# EAGLE board DWSTM32BAT (EAGLE 7.7.0)
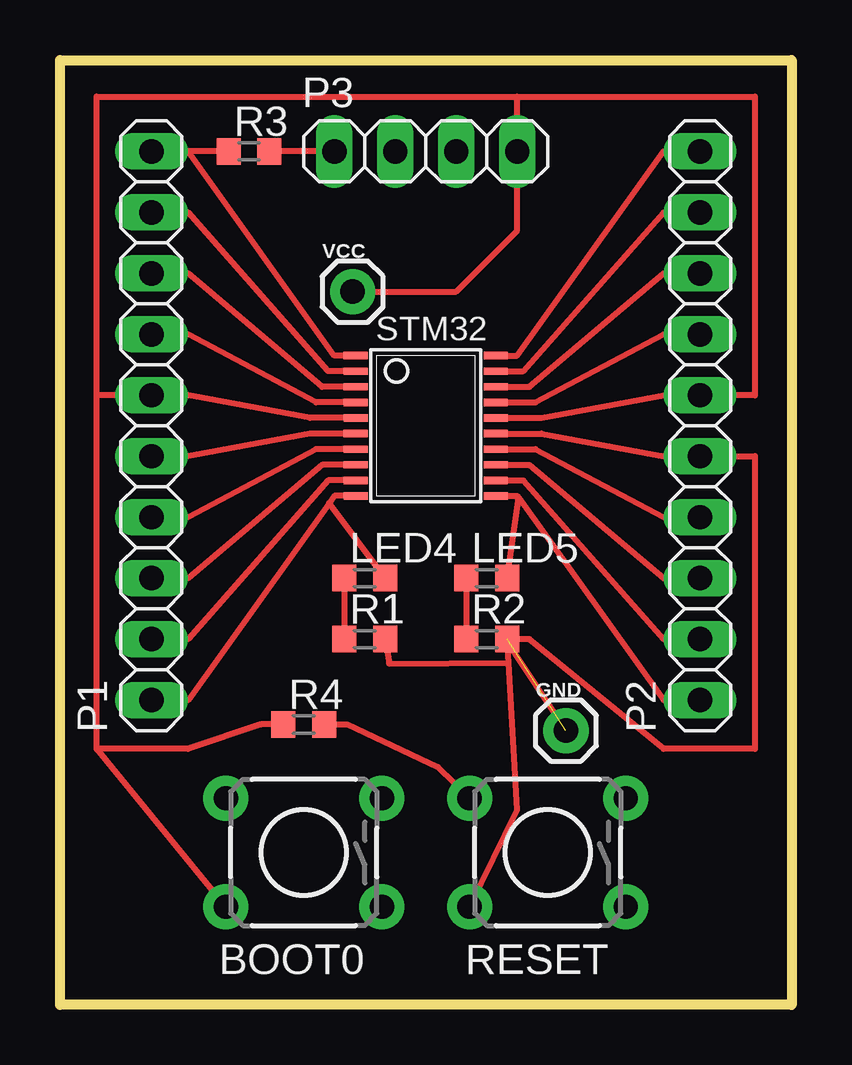
[diagram p0: board, top side]
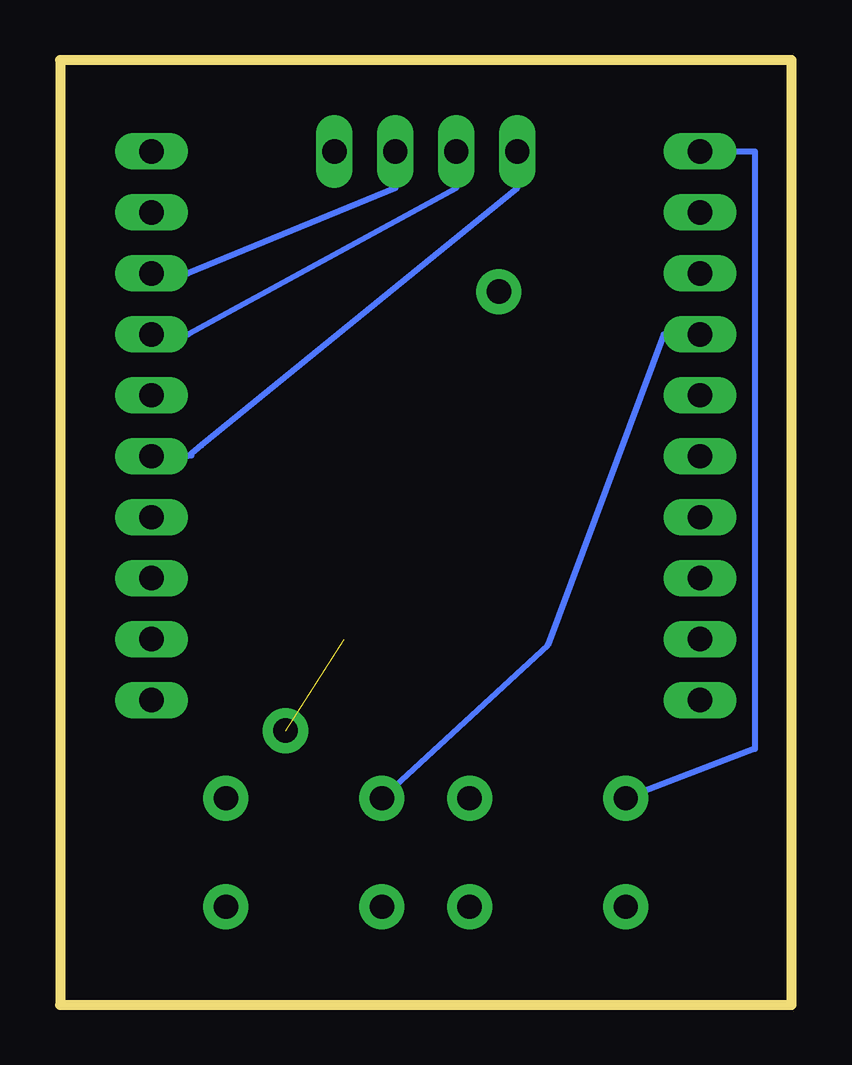
[diagram p1: board, bottom side, seen from below]

Size 30.48 x 39.37 mm. Coordinates in mm from the lower left corner, seen from the top.
Outline: 0,39.37 30.48,39.37 30.48,0 0,0 0,39.37
Copper layers (1*16): Top 0.035mm / dielectric 1.5mm / Bottom 0.035mm
Design rules "default": minimum track width 10mil, minimum drill 24mil, track to track 8mil, track to pad 8mil, pad to pad 8mil, via to via 8mil, smd to smd 8mil, copper to edge 40mil, drill to drill 8mil, minimum pad ring 10mil, minimum via ring 8mil, stop-mask expansion 4mil, vias tented up to drill 0mil, thermal gap 10mil

## Footprints (pad centres in the part's own frame; a part is rotated, then mirrored left to right if it is on the bottom)
TACTILE-PTH = drill 1.016 pad 1.88: 1 -3.251,2.261; 2 3.251,2.261; 3 -3.251,-2.261; 4 3.251,-2.261
1X01 = drill 1.016 pad 1.88: 1 0,0
R0603 = smd 1 x 1.1: 1 -0.85,0; 2 0.85,0
1X10 = drill 1.016 long: 1 -11.43,0; 2 -8.89,0; 3 -6.35,0; 4 -3.81,0; 5 -1.27,0; 6 1.27,0; 7 3.81,0; 8 6.35,0; 9 8.89,0; 10 11.43,0
1X04 = drill 1.016 long: 1 -3.81,0; 2 -1.27,0; 3 1.27,0; 4 3.81,0
TSSOP20 = smd 0.305 x 0.991: 1 -2.925,-2.918; 2 -2.275,-2.918; 3 -1.625,-2.918; 4 -0.975,-2.918; 5 -0.325,-2.918; 6 0.325,-2.918; 7 0.975,-2.918; 8 1.625,-2.918; 9 2.275,-2.918; 10 2.925,-2.918; 11 2.925,2.918; 12 2.275,2.918; 13 1.625,2.918; 14 0.975,2.918; 15 0.325,2.918; 16 -0.325,2.918; 17 -0.975,2.918; 18 -1.625,2.918; 19 -2.275,2.918; 20 -2.925,2.918

## Placement (x,y rotation side)
BOOT0  [TACTILE-PTH]  10.16,6.35 180 top
GND  [1X01]  21.08,11.43 0 top
LED4  [R0603]  12.7,17.78 0 top
LED5  [R0603]  17.78,17.78 0 top
P1  [1X10]  3.81,24.13 90 top
P2  [1X10]  26.67,24.13 90 top
P3  [1X04]  15.24,35.56 0 top
R1  [R0603]  12.7,15.24 0 top
R2  [R0603]  17.78,15.24 0 top
R3  [R0603]  7.87,35.56 0 top
R4  [R0603]  10.16,11.68 0 top
RESET  [TACTILE-PTH]  20.32,6.35 180 top
STM32  [TSSOP20]  15.24,24.13 270 top
VCC  [1X01]  12.19,29.72 0 top

## Library data of the parts
BOOT0 RESET = SparkFun-Electromechanical
GND VCC = SparkFun-Connectors
LED4 LED5 R1-R4 = ref-packages
P1-P3 = pinhead
STM32 = ref-packages-longpad

## Nets
BOOT0: BOOT0.4 P1.10 R3.1 STM32.1
GND: GND.1 P2.5 P3.1 R1.2 R2.2 R3.2 RESET.2 STM32.15
NRST: P1.7 R4.2 RESET.4 STM32.4
PA0: P1.5 STM32.6
PA1: P1.4 STM32.7
PA2: P1.3 STM32.8
PA3: P1.2 STM32.9
PA4: LED4.2 P1.1 STM32.10
PA5: LED5.2 P2.1 STM32.11
PA6: P2.2 STM32.12
PA7: P2.3 STM32.13
PB1: P2.4 STM32.14
PF0: P1.9 STM32.2
PF1: P1.8 STM32.3
RLED4: LED4.1 R1.1
RLED5: LED5.1 R2.1
RX: P2.8 P3.3 STM32.18
SWCLK: P2.10 STM32.20
SWDIO: P2.9 STM32.19
TX: P2.7 P3.2 STM32.17
VCC: BOOT0.2 P1.6 P2.6 P3.4 R4.1 STM32.5 STM32.16 VCC.1

## Tracks (layer width: path | path; a pad name or v marks a point on that pad's centre or on a via)
BOOT0
  Top 0.254: STM32.1 11.43,27.05 5.33,35.56 | 5.33,35.56 P1.10 | R3.1 5.33,35.56
  Bottom 0.254: P1.10 1.52,35.56 1.52,10.67 BOOT0.4
GND  (1 unrouted)
  Top 0.254: STM32.15 20.07,23.8 25.15,22.86 P2.5 28.96,22.86 28.96,10.67 25.15,10.67 19.56,15.24 R2.2 18.69,14.25 | P3.1 R3.2 | RESET.2 19.05,8.13 18.69,14.25 | R1.2 13.72,14.22 18.69,14.25 | 18.54,15.24 GND.1
  Bottom 0.254: P3.1 11.43,34.04 24.59,23.31 25.15,22.86 P2.5 24.99,22.89
NRST
  Top 0.254: STM32.4 10.67,25.11 5.33,27.94 P1.7 | R4.2 11.94,11.68 15.75,9.91 RESET.4
  Bottom 0.254: P1.7 5.33,27.94 10.16,14.99 RESET.4
PA0
  Top 0.254: STM32.6 10.41,23.8 5.33,22.86 P1.5
PA1
  Top 0.254: STM32.7 10.67,23.16 5.33,20.32 P1.4
PA2
  Top 0.254: STM32.8 10.92,22.51 5.33,17.78 P1.3
PA3
  Top 0.254: STM32.9 11.18,21.86 5.33,15.24 P1.2
PA4
  Top 0.254: STM32.10 11.43,21.21 11.22,20.91 | 11.22,20.91 5.33,12.7 P1.1 | LED4.2 11.22,20.91
PA5
  Top 0.254: STM32.11 19.05,21.21 19.11,21.12 | 19.11,21.12 25.15,12.7 P2.1 | LED5.2 19.11,21.12
PA6
  Top 0.254: STM32.12 19.3,21.86 25.15,15.24 P2.2
PA7
  Top 0.254: STM32.13 19.56,22.51 25.15,17.78 P2.3
PB1
  Top 0.254: STM32.14 19.81,23.16 25.15,20.32 P2.4
PF0
  Top 0.254: STM32.2 11.18,26.41 5.33,33.02 P1.9
PF1
  Top 0.254: STM32.3 10.92,25.76 5.33,30.48 P1.8
RLED4
  Top 0.254: LED4.1 R1.1
RLED5
  Top 0.254: LED5.1 R2.1
RX
  Top 0.254: STM32.18 19.56,25.76 25.15,30.48 P2.8
  Bottom 0.254: P3.3 16.51,34.04 25.15,30.48 P2.8
SWCLK
  Top 0.254: STM32.20 19.05,27.05 25.15,35.56 P2.10
SWDIO
  Top 0.254: STM32.19 19.3,26.41 25.15,33.02 P2.9
TX
  Top 0.254: STM32.17 19.81,25.11 25.15,27.94 P2.7
  Bottom 0.254: P3.2 13.97,34.04 25.15,27.94 P2.7
VCC
  Top 0.254: STM32.16 20.07,24.46 25.15,25.4 P2.6 28.96,25.4 28.96,37.85 19.05,37.85 | STM32.5 10.41,24.46 5.33,25.4 P1.6 1.52,25.4 | 19.05,37.85 P3.4 19.05,32.26 16.51,29.72 VCC.1 | 1.52,25.4 1.52,37.85 19.05,37.85 | R4.1 8.38,11.68 5.33,10.67 1.52,10.67 | 1.52,10.67 1.52,25.4 | BOOT0.2 1.52,10.67